# EAGLE board main (EAGLE 8.6.0)
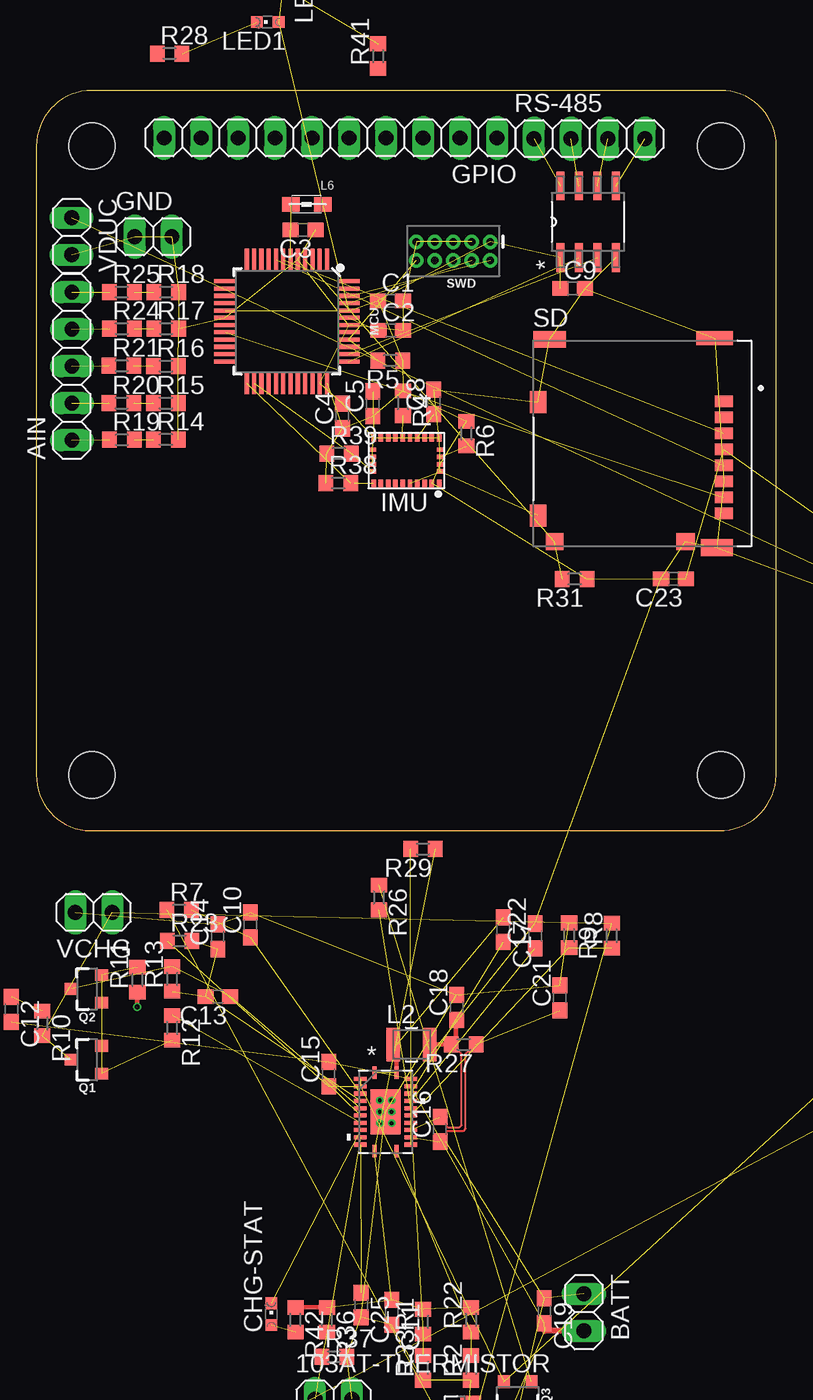
[diagram p0: board, top side]
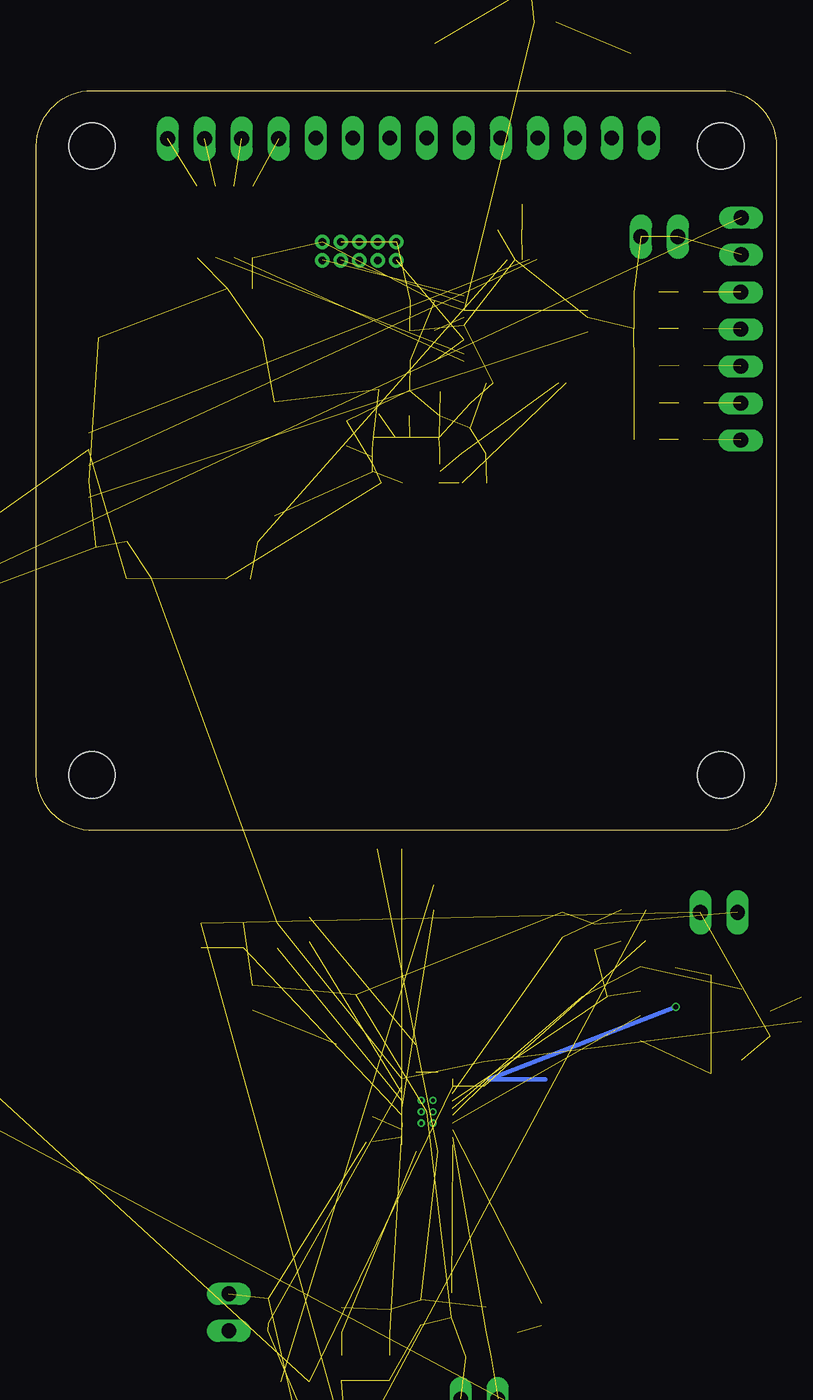
[diagram p1: board, bottom side, seen from below]

Size 50.8 x 50.8 mm. Coordinates in mm from the lower left corner, seen from the top.
Outline: 0,46.99 0,3.81 arc90 3.68,0 46.86,0 arc90 50.8,3.81 50.8,46.99 arc90 46.99,50.8 3.81,50.8 arc90 0,46.99
Copper layers (1*2*15*16): Top 0.035559375mm / dielectric 0.17018125mm / Route2 0.01778125mm / dielectric 47mil / Route15 0.01778125mm / dielectric 0.17018125mm / Bottom 0.035559375mm
Design rules "oshpark-4layer": minimum track width 5mil, minimum drill 10mil, track to track 5mil, track to pad 5mil, pad to pad 5mil, via to via 5mil, smd to smd 5mil, copper to edge 15mil, drill to drill 6mil, minimum pad ring 4mil, minimum via ring 4mil, stop-mask expansion 2.5mil, vias tented up to drill 0mil, thermal gap 10mil

## Footprints (pad centres in the part's own frame; a part is rotated, then mirrored left to right if it is on the bottom)
1X02 = drill 1.016 long: 1 -1.27,0; 2 1.27,0
1X05 = drill 1.016 long: 1 -5.08,0; 2 -2.54,0; 3 0,0; 4 2.54,0; 5 5.08,0
C0603 = smd 1.1 x 1: 1 -0.85,0; 2 0.85,0
CHIPLED_0603 = smd 0.8 x 0.8: A 0,-0.75; C 0,0.75
SOT23 = smd 1 x 1.4: 1 -0.95,-1.1; 2 0.95,-1.1; 3 0,1.1
R0603 = smd 1 x 1.1: 1 -0.85,0; 2 0.85,0
1X10 = drill 1.016 long: 1 -11.43,0; 2 -8.89,0; 3 -6.35,0; 4 -3.81,0; 5 -1.27,0; 6 1.27,0; 7 3.81,0; 8 6.35,0; 9 8.89,0; 10 11.43,0
LGA28R50P4X10_380X520X100 = smd 0.3 x 0.525: 1 -2.25,1.562; 6 -2.25,-1.562; 7 -1.75,-1.562; 8 -1.25,-1.562; 9 -0.75,-1.562; 10 -0.25,-1.562; 11 0.25,-1.562; 12 0.75,-1.562; 13 1.25,-1.562; 14 1.75,-1.562; 15 2.25,-1.562; 20 2.25,1.562; 21 1.75,1.562; 22 1.25,1.562; 23 0.75,1.562; 24 0.25,1.562; 25 -0.25,1.562; 26 -0.75,1.562; 27 -1.25,1.562; 28 -1.75,1.562 | smd 0.425 x 0.3: 2 -2.312,0.75; 3 -2.312,0.25; 4 -2.312,-0.25; 5 -2.312,-0.75; 16 2.312,-0.75; 17 2.312,-0.25; 18 2.312,0.25; 19 2.312,0.75
L2012C = smd 1 x 1: 1 -1,0; 2 1,0
INDC2520X220N = smd 0.95 x 2.3: 1 -1.25,0; 2 1.25,0
0805 = smd 1.2 x 1: 1 -1.1,0; 2 1.1,0
TQFP-48 = smd 1.5 x 0.28: 1 -4.25,2.75; 2 -4.25,2.25; 3 -4.25,1.75; 4 -4.25,1.25; 5 -4.25,0.75; 6 -4.25,0.25; 7 -4.25,-0.25; 8 -4.25,-0.75; 9 -4.25,-1.25; 10 -4.25,-1.75; 11 -4.25,-2.25; 12 -4.25,-2.75; 25 4.25,-2.75; 26 4.25,-2.25; 27 4.25,-1.75; 28 4.25,-1.25; 29 4.25,-0.75; 30 4.25,-0.25; 31 4.25,0.25; 32 4.25,0.75; 33 4.25,1.25; 34 4.25,1.75; 35 4.25,2.25; 36 4.25,2.75 | smd 0.28 x 1.5: 13 -2.75,-4.25; 14 -2.25,-4.25; 15 -1.75,-4.25; 16 -1.25,-4.25; 17 -0.75,-4.25; 18 -0.25,-4.25; 19 0.25,-4.25; 20 0.75,-4.25; 21 1.25,-4.25; 22 1.75,-4.25; 23 2.25,-4.25; 24 2.75,-4.25; 37 2.75,4.25; 38 2.25,4.25; 39 1.75,4.25; 40 1.25,4.25; 41 0.75,4.25; 42 0.25,4.25; 43 -0.25,4.25; 44 -0.75,4.25; 45 -1.25,4.25; 46 -1.75,4.25; 47 -2.25,4.25; 48 -2.75,4.25
SOT23-3 = smd 0.8 x 0.9: 1 -0.95,-1; 2 0.95,-1; 3 0,1.1
1X04 = drill 1.016 long: 1 -3.81,0; 2 -1.27,0; 3 1.27,0; 4 3.81,0
SWITCH_DPDT_SMD_AYZ0202 = smd 1 x 1.15: 1 -2.5,2.825; 2 0,2.825; 3 2.5,2.825; 4 -2.5,-2.825; 5 0,-2.825; 6 2.5,-2.825 | hole 0.85: 1.5,0; -1.5,0
MOLEX_503182-1852 = smd 0.8 x 1.24: 1 -2.9,6.355; 2 -1.8,6.355; 3 -0.7,6.355; 4 0.4,6.355; 5 1.5,6.355; 6 2.6,6.355; 7 3.7,6.355; 8 4.8,6.355 | smd 1.16 x 1.2: DT 6.74,-5.275 | smd 0.95 x 2.5: P1 -7.245,5.725 | smd 1.15 x 2.2: P2 7.145,5.875; P3 -7.145,-5.605 | smd 1.5 x 1.15: P4 -2.84,-6.4; P5 4.94,-6.4 | smd 1.16 x 1.25: SW 6.74,3.725
2X5-PTH-1.27MM = drill 0.508 pad 1: 1 -2.54,-0.635; 2 -2.54,0.635; 3 -1.27,-0.635; 4 -1.27,0.635; 5 0,-0.635; 6 0,0.635; 7 1.27,-0.635; 8 1.27,0.635; 9 2.54,-0.635; 10 2.54,0.635
DSG0008A = smd 0.5 x 0.25: 1 -0.95,0.75; 2 -0.95,0.25; 3 -0.95,-0.25; 4 -0.95,-0.75; 5 0.95,-0.75; 6 0.95,-0.25; 7 0.95,0.25; 8 0.95,0.75 | smd 0.9 x 1.6: 9 0,0 | smd 0.5 x 0.5: V 0,-0.4
RGY24_2P05X3P1 = smd 0.28 x 0.85: 1 -0.75,2.696; 12 -0.75,-2.696; 13 0.75,-2.696; 24 0.75,2.696 | smd 0.85 x 0.28: 2 -1.731,2.25; 3 -1.731,1.75; 4 -1.731,1.25; 5 -1.731,0.75; 6 -1.731,0.25; 7 -1.731,-0.25; 8 -1.731,-0.75; 9 -1.731,-1.25; 10 -1.731,-1.75; 11 -1.731,-2.25; 14 1.731,-2.25; 15 1.731,-1.75; 16 1.731,-1.25; 17 1.731,-0.75; 18 1.731,-0.25; 19 1.731,0.25; 20 1.731,0.75; 21 1.731,1.25; 22 1.731,1.75; 23 1.731,2.25 | smd 2.05 x 3.1: 25 0,0 | drill 0.254 pad 0.508: V -0.406,-0.787; V_1 -0.406,0; V_2 -0.406,0.787; V_3 0.406,-0.787; V_4 0.406,0; V_5 0.406,0.787
D8 = smd 1.981 x 0.559: 1 -2.464,1.905; 2 -2.464,0.635; 3 -2.464,-0.635; 4 -2.464,-1.905; 5 2.464,-1.905; 6 2.464,-0.635; 7 2.464,0.635; 8 2.464,1.905
DRILL_0.1250 = hole 3.175: 0,0

## Placement (x,y rotation side)
103AT-THERMISTOR  10k  [1X02]  20.4,-39.01 0 top  (outside the outline)
AIN  [1X05]  2.44,31.88 90 top
BATT  [1X02]  37.59,-33.07 270 top  (outside the outline)
C1  100n  [C0603]  24.31,36.36 0 top
C2  100n  [C0603]  24.33,34.33 0 top
C3  100n  [C0603]  18.3,41.24 180 top
C4  6.8n  [C0603]  21.02,28.46 90 top
C5  100n  [C0603]  23.1,29.3 90 top
C6  22u  [C0603]  69.16,1.96 270 top  (outside the outline)
C7  10u  [C0603]  -2.51,-50.88 0 top  (outside the outline)
C8  100n  [C0603]  27.28,29.43 90 top
C9  100n  [C0603]  36.82,37.21 0 top
C10  1u  [C0603]  14.69,-6.48 90 top  (outside the outline)
C11  1u  [C0603]  24.38,-33.07 270 top  (outside the outline)
C12  2.2u  [C0603]  -1.73,-12.27 270 top  (outside the outline)
C13  100n  [C0603]  12.46,-11.39 180 top  (outside the outline)
C14  100n  [C0603]  12.45,-7.29 90 top  (outside the outline)
C15  10u  [C0603]  20.07,-16.71 90 top  (outside the outline)
C16  100n  [C0603]  27.71,-20.5 90 top  (outside the outline)
C17  47n  [C0603]  32.05,-6.81 270 top  (outside the outline)
C18  100n  [C0603]  28.85,-12.13 90 top  (outside the outline)
C19  10u  [C0603]  34.87,-32.97 270 top  (outside the outline)
C21  100n  [C0603]  35.94,-11.48 90 top  (outside the outline)
C22  1u  [C0603]  34.24,-7.24 90 top  (outside the outline)
C23  100n  [C0603]  43.74,17.28 180 top
C25  1u  [C0603]  22.29,-32.56 270 top  (outside the outline)
CHG-STAT  2V @ 20mA  [CHIPLED_0603]  16.13,-33.2 0 top  (outside the outline)
D1  BAS70-05  [SOT23]  28.73,-40.23 90 top  (outside the outline)
GND  [1X02]  8.03,40.77 0 top
GND-JMP  0  [R0603]  29.21,-46.91 90 top  (outside the outline)
GPIO  [1X10]  20.19,47.55 180 top
IMU  BNO055  [LGA28R50P4X10_380X520X100]  25.4,25.4 180 top
L1  2.2u  [L2012C]  69.29,9.5 90 top  (outside the outline)
L2  6.8u  [INDC2520X220N]  25.76,-14.68 0 top  (outside the outline)
L6  MH2029-300Y  [0805]  18.55,42.99 180 top
LED0  2V @ 20mA  [CHIPLED_0603]  17.07,58.57 180 top  (outside the outline)
LED1  2V @ 20mA  [CHIPLED_0603]  15.88,55.5 90 top  (outside the outline)
MCU  ATSAMD21G-A  [TQFP-48]  17.2,34.95 270 top
Q1  5.8A/30V/35mΩ  [SOT23-3]  3.48,-15.72 90 top  (outside the outline)
Q2  5.8A/30V/35mΩ  [SOT23-3]  3.48,-10.87 90 top  (outside the outline)
Q3  2.5A/30V/105mΩ  [SOT23-3]  33.05,-38.84 180 top  (outside the outline)
R1  100k  [R0603]  26.54,-33.71 90 top  (outside the outline)
R2  3.8k  [R0603]  29.84,-36.88 90 top  (outside the outline)
R3  100k  [R0603]  69.01,5.51 90 top  (outside the outline)
R4  10k  [R0603]  25.17,29.34 270 top
R5  10k  [R0603]  24.3,32.27 180 top
R6  10k  [R0603]  29.51,27.25 270 top
R7  10  [R0603]  9.8,-5.46 0 top  (outside the outline)
R8  1M  [R0603]  39.5,-7.21 90 top  (outside the outline)
R9  113k  [R0603]  36.58,-7.19 270 top  (outside the outline)
R10  2  [R0603]  0.41,-13.23 270 top  (outside the outline)
R11  4.02k  [R0603]  6.93,-10.24 90 top  (outside the outline)
R12  4.02k  [R0603]  9.32,-13.54 270 top  (outside the outline)
R13  20m  [R0603]  9.32,-10.19 90 top  (outside the outline)
R14  3.3k  [R0603]  8.89,26.85 0 top
R15  3.3k  [R0603]  8.89,29.34 0 top
R16  3.3k  [R0603]  8.89,31.88 0 top
R17  3.3k  [R0603]  8.92,34.44 0 top
R18  3.3k  [R0603]  8.92,36.96 0 top
R19  1.6k  [R0603]  5.87,26.82 0 top
R20  1.6k  [R0603]  5.84,29.34 0 top
R21  1.6k  [R0603]  5.84,31.9 0 top
R22  100k  [R0603]  29.84,-33.58 90 top  (outside the outline)
R23  0  [R0603]  9.83,-7.57 0 top  (outside the outline)
R24  1.6k  [R0603]  5.87,34.44 0 top
R25  1.6k  [R0603]  5.87,36.96 0 top
R26  1k  [R0603]  23.52,-4.6 270 top  (outside the outline)
R27  10m  [R0603]  29.34,-14.68 180 top  (outside the outline)
R28  64.9  [R0603]  9.14,53.34 0 top
R29  1k  [R0603]  26.54,-1.27 180 top
R31  10k  [R0603]  36.96,17.27 180 top
R33  13.8k  [R0603]  26.54,-36.88 90 top  (outside the outline)
R36  5.23k  [R0603]  19.94,-33.58 270 top  (outside the outline)
R37  30.1k  [R0603]  20.45,-36.12 0 top  (outside the outline)
R38  1k  [R0603]  20.73,23.85 0 top
R39  1k  [R0603]  20.78,25.88 0 top
R41  64.9  [R0603]  23.47,53.16 90 top
R42  64.9  [R0603]  17.78,-33.58 270 top  (outside the outline)
RS-485  [1X04]  37.97,47.5 0 top
S2  [SWITCH_DPDT_SMD_AYZ0202]  56.9,-17.73 90 top  (outside the outline)
SD  503182-1852  [MOLEX_503182-1852]  40.84,26.57 270 top
SWD  CORTEX_DEBUG_PTH  [2X5-PTH-1.27MM]  28.63,39.78 180 top
TPS62162-Q1  [DSG0008A]  74.32,8.71 0 top  (outside the outline)
U1  BQ24133_RGY_24  [RGY24_2P05X3P1]  23.98,-19.3 0 top  (outside the outline)
U2  SN65HVD32_D_8  [D8]  37.87,41.78 90 top
U$1  [DRILL_0.1250]  3.81,3.81 0 top
U$2  [DRILL_0.1250]  3.81,46.99 0 top
U$3  [DRILL_0.1250]  46.99,3.81 0 top
U$4  [DRILL_0.1250]  46.99,46.99 0 top
VCHG  [1X02]  3.94,-5.61 180 top  (outside the outline)
VDUC  [1X02]  2.41,40.79 270 top

## Library data of the parts
103AT-THERMISTOR AIN BATT GND GPIO RS-485 VCHG VDUC = pinhead
C1-C19 C21-C23 C25 GND-JMP L1 R1-R29 R31 R33 R36-R39 R41 R42 = resistor
CHG-STAT LED0 LED1 = adafruit
D1 = diode
IMU = BNO055; AVAILABILITY: Good; DESCRIPTION: IMU ACCEL/GYRO/MAG I2C 28LGA; MF: Bosch; MP: BNO055; PACKAGE: LGA-28 Bosch; PRICE: 7.78 USD
L2 = ipc-7351-inductor
L6 = Protezione; MONTHLY_USAGE: _____; PART_NUMBER: BLM21PG300SN1D_/_MH2029-300Y; PRICE: _____; SUPPLIER: _____; TYPE: Protezione
MCU = SparkFun-IC-Microcontroller; PROD_ID: IC-13064
Q1 = SparkFun-DiscreteSemi; PROD_ID: TRANS-12988; SPICEPREFIX: Q
Q2 = SparkFun-DiscreteSemi; PROD_ID: TRANS-12988
Q3 = SparkFun-DiscreteSemi; PROD_ID: TRANS-11308
S2 = SparkFun-Switches; PROD_ID: SWCH-08179; SF_ID: COM-00597
SD = molex-microSD; DESCRIPTION: MICRO SD NORMAL ULTRALOWPRO8CKTE; DIGI-KEY_PART_NUMBER: WM12834CT-ND; DIGI-KEY_PURCHASE_URL: https://www.digikey.com/product-detail/en/molex-llc/5031821852/WM12834CT-ND/5823232?WT.z_cid=ref_snapeda&utm_source=snapeda&utm_medium=aggregator&utm_campaign=buynow; MF: Molex; MP: 5031821852; PACKAGE: None
SWD = SparkFun-Connectors
TPS62162-Q1 = TPS62162-Q1; MANUFACTURER: Texas Instruments; PARTNUMBER: TPS62162QDSGRQ1; REFDES: RefDes; TYPE: TYPE
U1 = BQ24133-UPDATED; DATASHEETURL: httpwww.ti.comlitgpnBQ24133; FAMILY_NAME: BATTERY CHARGE MANAGEMENT; GENERIC_PART_NUMBER: BQ24133; INDUSTRY_STD_PKG_TYPE: VQFN; MANUFACTURER: Texas Instruments; PACKAGE_DESIGNATOR: RGY; PIN_COUNT: 24
U2 = SN65HVD32; DATASHEETURL: httpwww.ti.comlitgpnSN65HVD32; FAMILY_NAME: RS485; GENERIC_PART_NUMBER: SN65HVD32; INDUSTRY_STD_PKG_TYPE: SOIC; MANUFACTURER: Texas Instruments; MANUFACTURER_PART_NUMBER: sn65hvd32_d_8; PACKAGE_DESIGNATOR: D; PIN_COUNT: 8; VENDOR: Texas Instruments
U$1-U$4 = special-drill

## Nets
3.3V: C1.1 C4.1 C5.1 C6.1 C9.1 C23.1 IMU.3 IMU.28 L1.2 L6.1 LED0.A LED1.A MCU.17 MCU.36 MCU.44 R3.2 R4.1 R5.1 R6.1 R31.1 R38.1 R39.1 SD.4 SWD.1 TPS62162-Q1.6 U2.1
*BATDRV: R26.2 U1.19
AGND: 103AT-THERMISTOR.2 C10.2 C11.2 C14.2 C18.2 C21.2 C25.2 GND-JMP.2 R2.1 R9.1 R33.1 R37.2 U1.25 VCHG.2
AIN0: R14.1 R19.2
AIN1: R15.1 R20.2
AIN2: R16.1 R21.2
AIN3: R17.1 R24.2
AIN4: R18.1 R25.2
BATT: BATT.1 C16.1 C19.1 C21.1 D1.2 Q3.3 R27.1 U1.15
FB: C6.2 TPS62162-Q1.5
GND: BATT.2 C1.2 C2.2 C3.1 C4.2 C5.2 C7.2 C8.2 C9.2 C12.2 C15.2 C19.2 C22.2 C23.2 GND-JMP.1 GND.1 GND.2 IMU.2 IMU.5 IMU.6 IMU.10 IMU.15 IMU.16 IMU.17 IMU.18 IMU.25 MCU.5 MCU.18 MCU.35 MCU.42 R14.2 R15.2 R16.2 R17.2 R18.2 SD.6 SD.P1 SD.P2 SD.P3 SD.P4 SD.P5 SD.SW SWD.3 SWD.5 SWD.9 TPS62162-Q1.1 TPS62162-Q1.4 TPS62162-Q1.9 U1.22 U1.23 U2.4 VDUC.2
GPIO1: GPIO.1
GPIO2: GPIO.2
GPIO3: GPIO.3
GPIO4: GPIO.4
GPIO5: GPIO.5
GPIO6: GPIO.6
GPIO7: GPIO.7
GPIO8: GPIO.8
GPIO9: GPIO.9
GPIO10: GPIO.10
IMU_INT: IMU.14
MCU_RX: MCU.38 U2.3
MCU_TX: MCU.37 U2.2
N$1: AIN.2 R20.1
N$2: C3.2 L6.2 MCU.6
N$3: AIN.3 R21.1
N$4: AIN.4 R24.1
N$5: AIN.5 R25.1
N$6: RS-485.1 U2.8
N$7: LED0.C R41.2
N$8: AIN.1 R19.1
N$9: C8.1 IMU.9
N$10: Q3.1 R26.1
N$11: RS-485.2 U2.7
N$12: RS-485.3 U2.6
N$13: RS-485.4 U2.5
N$14: D1.3 R7.1
N$15: C12.1 R10.1
N$16: Q1.2 Q2.2 R11.2
N$17: Q1.1 Q2.1 R12.2
N$18: IMU.4 R6.2
N$19: SD.2
N$20: LED1.C R28.2
N$21: C10.1 R7.2 U1.4
N$23: CHG-STAT.A R42.2
NRESET: IMU.11 R4.2
PA16_SER1_I2C_SDA: IMU.20 MCU.25 R38.2
PA17_SER1_I2C_SCL: IMU.19 MCU.26 R39.2
PA30_SWCLK: MCU.45 SWD.4
PA31_SWDIO: MCU.46 SWD.2
PB08D_SER4_P0: MCU.7 SD.3
PB09D_SER4_P1: MCU.8 SD.5
PB11D_SER4_P3: MCU.20 SD.7
PC_ACDRV: R12.1 U1.8
PC_ACN: C13.2 C14.1 R13.1 R23.2 U1.5
PC_ACP: C13.1 Q2.3 R13.2 U1.6
PC_ACSET: R1.1 R33.2 U1.17
PC_BTST: C17.2 U1.21
PC_CELL: R29.2 U1.14
PC_CMSRC: R11.1 U1.7
PC_ISET: R2.2 R22.1 U1.13
PC_OVPSET: R8.1 R9.2 U1.18
PC_PVCC: C15.1 Q3.2 R23.1 S2.2 U1.2 U1.3
PC_REGN: C22.1 U1.20
PC_SRP: C16.2 C18.1 L2.2 R27.2 U1.16
PC_STAT: CHG-STAT.C U1.9
PC_SW: C17.1 L2.1 U1.1 U1.24
PC_TS: 103AT-THERMISTOR.1 R36.2 R37.1 U1.10
PC_TTC: C25.1 U1.11
PC_VREF: C11.1 R1.2 R22.2 R29.1 R36.1 R42.1 U1.12
PG: R3.1 TPS62162-Q1.8
SD_CD: MCU.4 R31.2 SD.DT
SD_CS: MCU.1
SW: L1.1 TPS62162-Q1.7
SWD_NRES: MCU.40 R5.2 SWD.10
VDDCORE: C2.1 MCU.43
VIN: D1.1 Q1.3 R8.2 R10.2 VCHG.1
VSYS: C7.1 S2.1 TPS62162-Q1.2 TPS62162-Q1.3 VDUC.1

## Tracks (layer width: path | path; a pad name or v marks a point on that pad's centre or on a via)
3.3V  (25 unrouted)
*BATDRV  (1 unrouted)
AGND  (13 unrouted)
  Top 0.406: R37.2 21.32,-36.14
AIN0  (1 unrouted)
AIN1  (1 unrouted)
AIN2  (1 unrouted)
AIN3  (1 unrouted)
AIN4  (1 unrouted)
BATT  (6 unrouted)
  Top 0.152: R27.1 30.16,-15.16 29.64,-15.16 29.46,-15.34 29.46,-20.45 29.27,-20.64 28.18,-20.64 28.13,-20.69 28.13,-21.35 C16.1
FB  (1 unrouted)
GND  (51 unrouted)
  Top 0.406: BATT.2 34.9,-34.34
MCU_RX  (1 unrouted)
MCU_TX  (1 unrouted)
N$1  (1 unrouted)
N$2  (2 unrouted)
N$3  (1 unrouted)
N$4  (1 unrouted)
N$5  (1 unrouted)
N$6  (1 unrouted)
N$7  (1 unrouted)
N$8  (1 unrouted)
N$9  (1 unrouted)
N$10  (1 unrouted)
N$11  (1 unrouted)
N$12  (1 unrouted)
N$13  (1 unrouted)
N$14  (1 unrouted)
N$15  (1 unrouted)
N$16  (2 unrouted)
N$17  (2 unrouted)
N$18  (1 unrouted)
N$20  (1 unrouted)
N$21  (2 unrouted)
N$23  (1 unrouted)
NRESET  (1 unrouted)
PA16_SER1_I2C_SDA  (2 unrouted)
  Top 0.254: R38.2 21.79,23.84
PA17_SER1_I2C_SCL  (2 unrouted)
PA30_SWCLK  (1 unrouted)
PA31_SWDIO  (1 unrouted)
PB08D_SER4_P0  (1 unrouted)
PB09D_SER4_P1  (1 unrouted)
PB11D_SER4_P3  (1 unrouted)
PC_ACDRV  (1 unrouted)
PC_ACN  (4 unrouted)
PC_ACP  (3 unrouted)
PC_ACSET  (2 unrouted)
PC_BTST  (1 unrouted)
PC_CELL  (1 unrouted)
PC_CMSRC  (via drill 0.35)  (1 unrouted)
  Top 0.305: v6.91,-12.09 6.91,-11.11 R11.1
  Bottom 0.305: 15.85,-17.08 19.72,-17.08 v6.91,-12.09
PC_ISET  (2 unrouted)
PC_OVPSET  (2 unrouted)
PC_PVCC  (5 unrouted)
PC_REGN  (1 unrouted)
PC_SRP  (1 unrouted)
  Top 0.152: R27.2 28.51,-15.16 29.01,-15.16 29.18,-15.34 29.18,-20.22 29.05,-20.36 28.23,-20.36 28.13,-20.26 28.13,-20.07 C16.2
  Top 0.305: L2.2 R27.2 28.49,-14.58 28.82,-14.25 28.82,-13.02 C18.1
PC_STAT  (1 unrouted)
PC_SW  (2 unrouted)
  Top 0.305: U1.24 24.73,-14.71 L2.1
PC_TS  (3 unrouted)
PC_TTC  (1 unrouted)
PC_VREF  (5 unrouted)
  Top 0.305: R36.1 R42.1
PG  (1 unrouted)
SD_CD  (2 unrouted)
SW  (1 unrouted)
SWD_NRES  (2 unrouted)
VDDCORE  (1 unrouted)
VIN  (4 unrouted)
VSYS  (4 unrouted)